# Altium PCB BMS_3.PcbDoc
Units mm, origin at the board's own origin, x right, y up, seen from the top; angles counter-clockwise.
Board outline 310 x 114 mm, 2 copper layers (Top Layer, Bottom Layer); 100 components, 103 nets, 399 pads, 0 vias.
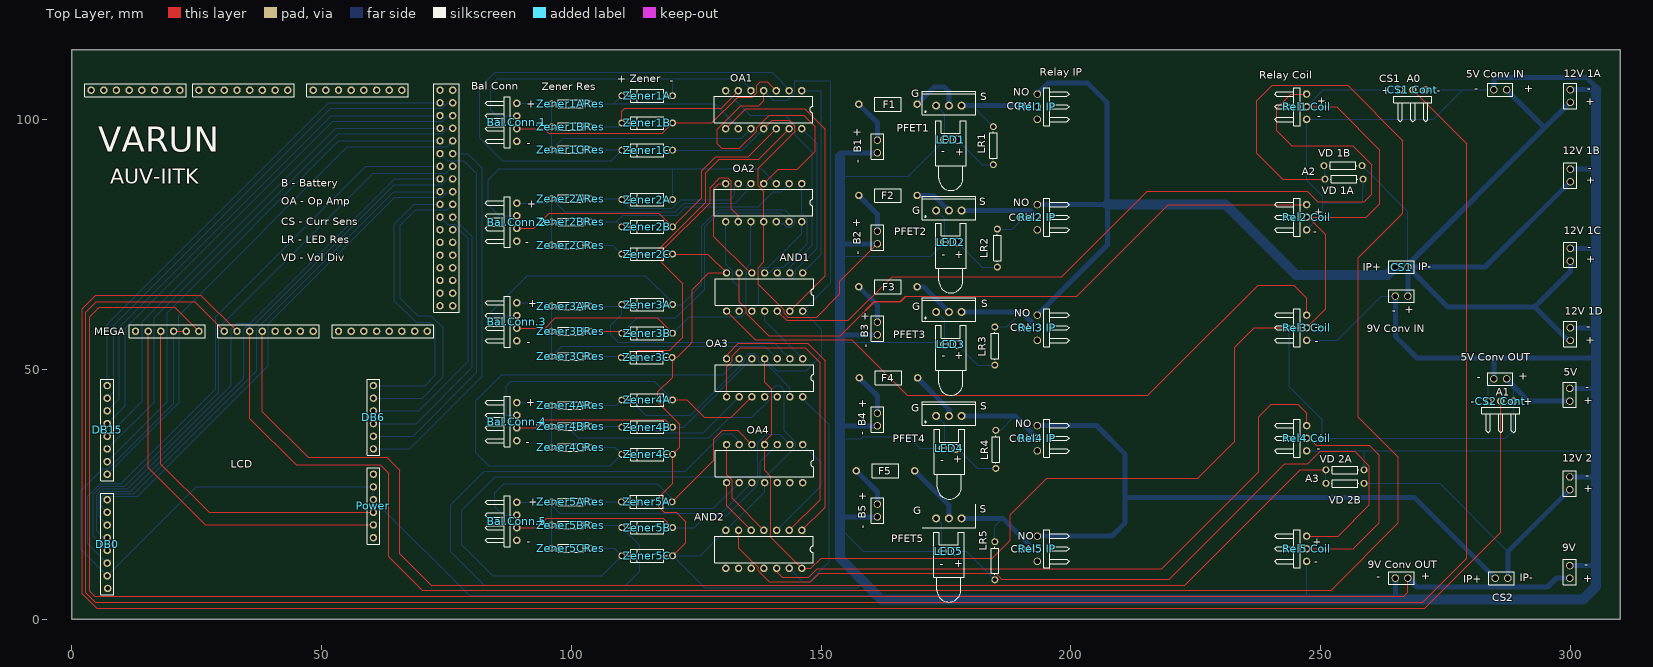
[diagram p0: Top Layer view]
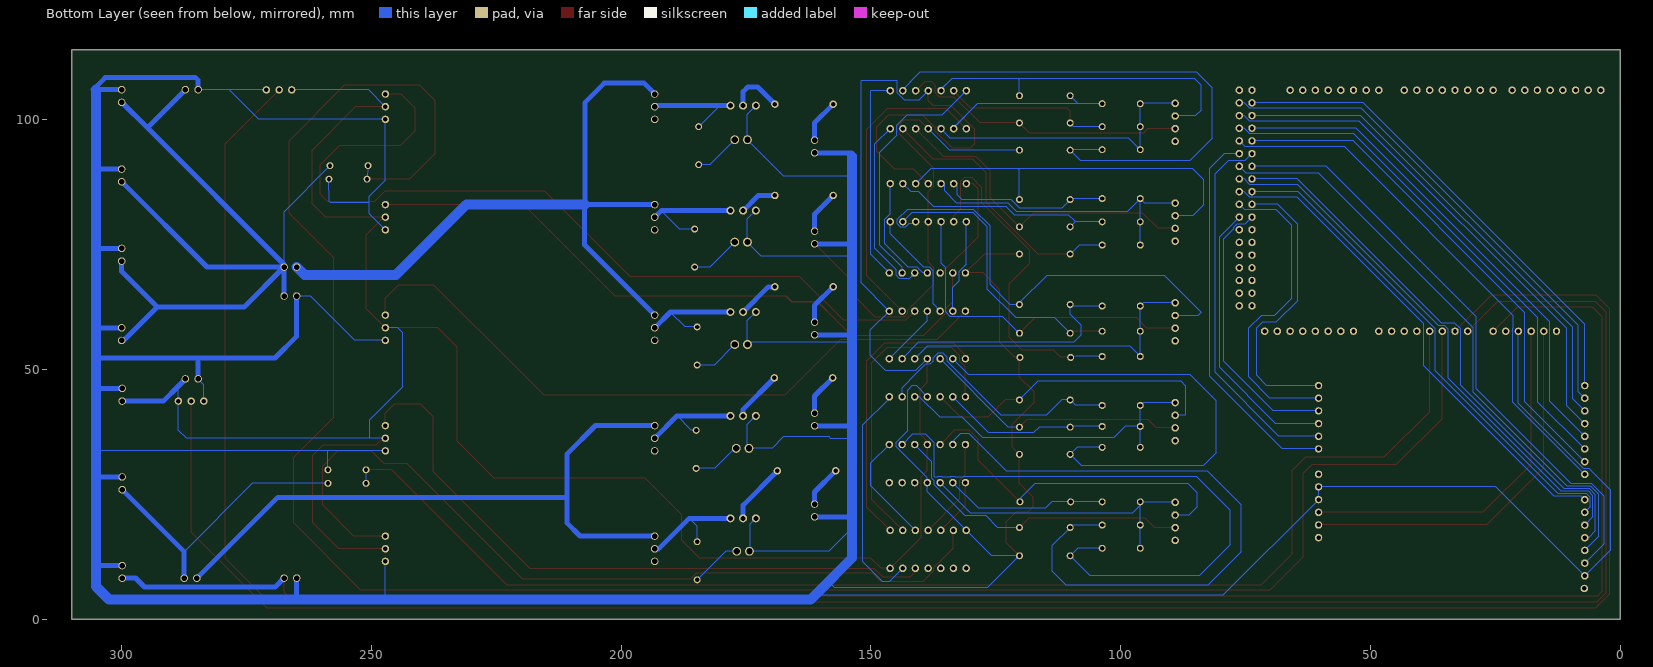
[diagram p1: Bottom Layer view, seen from below]

## Layer stack, top to bottom
Top Solder: solder mask 0.0102, Solder Resist, Dk 3.5
Top Layer: signal copper 0.0356
Dielectric 1: dielectric 0.32, FR-4, Dk 4.8
Bottom Layer: signal copper 0.0356
Bottom Solder: solder mask 0.0102, Solder Resist, Dk 3.5

## Board outline
0,0 310,0 310,114 0,114

## Design rules (kind name [scope] priority, off if disabled: settings)
Clearance [All] p1: gap=0.25
PolygonConnect [All] p1: connectstyle=Relief reliefconductorwidth=0.254 reliefentries=4 polygonreliefangle="90 Angle" airgapwidth=0.254
RoutingVias [All] p1: holewidth=0.6 width=1 viastyle="Through Hole" minholewidth=0.6 minwidth=1 maxholewidth=0.6 maxwidth=1
SolderMaskExpansion [All] p1: expansion=0.1
UnpouredPolygon [All] p1: allowunpoured=FALSE
Width [All] p1 off: maxlimit=0.1 minlimit=0.1 preferedwidth=0.1
29 further rules are at their usual default settings.

## Components (designator, comment, footprint, x,y, rotation, side; value= is the part's Value field where it differs from the comment)
5V "Header 2" HDR1X2 299.9,43.66 r90 top
"5V Conv IN" "Header 2" HDR1X2 287.24,106 r180 top (schematic designator "5V Conv. IN")
"5V Conv OUT" "Header 2" HDR1X2 287.24,48.1 r180 top (schematic designator "5V Conv. OUT")
9V "Header 2" HDR1X2 299.9,8.2 r90 top
"9V Conv IN" "Header 2" HDR1X2 267.5,64.7 r180 top (schematic designator "9V Conv. IN")
"9V Conv OUT" "Header 2" HDR1X2 267.5,8.24 r180 top (schematic designator "9V Conv. OUT")
"12V 1A" "Header 2" HDR1X2 300,103.46 r90 top
"12V 1B" "Header 2" HDR1X2 300,87.573 r90 top
"12V 1C" "Header 2" HDR1X2 300,71.687 r90 top
"12V 1D" "Header 2" HDR1X2 300,55.8 r90 top
"12V 2" "12V supply" HDR1X2 299.9,25.93 r90 top
AND1 "SN74ACT11D" N014 138.7,65.5 r180 top (schematic designator A1)
AND2 "SN74ACT11D" N014 138.56,13.99 r180 top (schematic designator A2)
B1 "Header 2" HDR1X2 161.3,95.9 r270 top
B2 "Battery" HDR1X2 161.3,77.685 r270 top
B3 "Battery" HDR1X2 161.3,59.47 r270 top
B4 "Battery" HDR1X2 161.3,41.255 r270 top
B5 "Battery" HDR1X2 161.3,23.04 r270 top
Bal.Conn.1 "Balance Connector" HDR1X4H 89.1,103.28 r270 top
Bal.Conn.2 "Balance Connector" HDR1X4H 89.1,83.31 r270 top
Bal.Conn.3 "Balance Connector" HDR1X4H 89.1,63.34 r270 top
Bal.Conn.4 "Balance Connector" HDR1X4H 89.1,43.37 r270 top
Bal.Conn.5 "Balance Connector" HDR1X4H 89.1,23.4 r270 top
CS1 "Header 2" HDR1X2 264.96,70.5 r0 top
"CS1 Cont" "Header 3H" HDR1X3H#1 265.96,105.96 r0 top (schematic designator "C.S.1 Cont.")
CS2 "Header 2" HDR1X2 284.96,8.2 r0 top
"CS2 Cont" "Header 3H" HDR1X3H#1 288.64,43.66 r180 top (schematic designator "C.S.2 Cont.")
DB0 "Header 8" HDR1X8#1 7.1,6.15 r90 top
DB6 "Header 6" HDR1X6 60.4,34.08 r90 top locked
DB15 "Header 8" HDR1X8#2 7.1,29 r90 top
F1 "Fuse" PIN-W2/E2.8 163.4,103.1 r180 top
F2 "Fuse" PIN-W2/E2.8 163.4,84.825 r180 top
F3 "Fuse" PIN-W2/E2.8 163.4,66.55 r180 top
F4 "Fuse" PIN-W2/E2.8 163.5,48.3 r180 top
F5 "Fuse5" PIN-W2/E2.8 162.9,29.7 r180 top
LED1 "LED" LED-0 176,96 r0 top
LED2 "LED" LED-0 176,75.5 r0 top
LED3 "LED" LED-0 176,55 r0 top
LED4 "LED" LED-0 175.7,34.2 r0 top
LED5 "LED" LED-0 175.6,13.6 r0 top
LR1 "500" AXIAL-0.3 184.5,94.8 r90 top
LR2 "500" AXIAL-0.3 185.3,74.3 r90 top
LR3 "500" AXIAL-0.3 184.8,54.7 r90 top
LR4 "500" AXIAL-0.3 185,34 r90 top
LR5 "500" AXIAL-0.3 184.8,11.7 r90 top
MEGA "Arduino" Arduino 33.08,83.05 r0 top
OA1 "LM324D" N014 138.52,102.01 r180 top
OA2 "LM324D" N014 138.52,83.4 r180 top
OA3 "LM324D" N014 138.7,48.33 r180 top
OA4 "LM324D" N014 138.7,31.16 r180 top
PFET1 "PMOS" TO-220AB 175.6,102.8 r0 top
PFET2 "PMOS" TO-220AB 175.6,81.8 r0 top
PFET3 "PMOS" TO-220AB 175.6,61.5 r0 top
PFET4 "PMOS" TO-220AB 175.6,40.7 r0 top
PFET5 "PMOS" TO-220AB 175.6,20.2 r0 top
Power "Header 6" HDR1X6 60.4,16.32 r90 top
"Rel1 Coil" "Relay coil" HDR1X3H#1 247.2,100.06 r90 top
"Rel1 IP" "Relay" HDR1X3H#2 193.3,100.06 r90 top
"Rel2 Coil" "Relay coil" HDR1X3H#1 247.2,77.935 r90 top
"Rel2 IP" "Relay" HDR1X3H#2 193.3,77.935 r90 top
"Rel3 Coil" "Relay coil" HDR1X3H#1 247.2,55.81 r90 top
"Rel3 IP" "Relay" HDR1X3H#2 193.3,55.81 r90 top
"Rel4 Coil" "Relay coil" HDR1X3H#1 247.2,33.685 r90 top
"Rel4 IP" "Relay" HDR1X3H#2 193.3,33.685 r90 top
"Rel5 Coil" "Relay coil" HDR1X3H#1 247.2,11.56 r90 top
"Rel5 IP" "Relay" HDR1X3H#2 193.3,11.56 r90 top
"VD 1A" "Res2" AXIAL-0.3 254.7,88.1 r180 top (schematic designator VD1A)
"VD 1B" "Res1" AXIAL-0.3 254.5,90.8 r0 top
"VD 2A" "Res1" AXIAL-0.3 254.9,27.2 r180 top
"VD 2B" "Res1" AXIAL-0.3 254.9,29.9 r0 top
Zener1A "D Zener" DIODE-0.4 115.2,104.8 r180 top
Zener1ARes "1K" AXIAL-0.3 99.9,103.2 r180 top
Zener1B "D Zener" DIODE-0.4 115.2,99.35 r180 top
Zener1BRes "1K" AXIAL-0.3 99.9,98.6 r180 top
Zener1C "D Zener" DIODE-0.4 115.2,93.9 r180 top
Zener1CRes "1K" AXIAL-0.3 99.9,94 r180 top
Zener2A "D Zener" DIODE-0.4 115.2,84 r180 top
Zener2ARes "1K" AXIAL-0.3 99.9,84.2 r180 top
Zener2B "D Zener" DIODE-0.4 115.2,78.55 r180 top
Zener2BRes "1K" AXIAL-0.3 99.9,79.55 r180 top
Zener2C "D Zener" DIODE-0.4 115.2,73.1 r180 top
Zener2CRes "1K" AXIAL-0.3 99.9,74.9 r180 top
Zener3A "D Zener" DIODE-0.4 115.2,63 r180 top
Zener3ARes "1K" AXIAL-0.3 99.9,62.7 r180 top
Zener3B "D Zener" DIODE-0.4 115.2,57.25 r180 top
Zener3BRes "1K" AXIAL-0.3 99.9,57.65 r180 top
Zener3C "D Zener" DIODE-0.4 115.1,52.4 r180 top
Zener3CRes "1K" AXIAL-0.3 99.9,52.6 r180 top
Zener4A "D Zener" DIODE-0.4 115.2,43.9 r180 top
Zener4ARes "1K" AXIAL-0.3 99.9,42.8 r180 top
Zener4B "D Zener" DIODE-0.4 115.2,38.45 r180 top
Zener4BRes "1K" AXIAL-0.3 99.9,38.6 r180 top
Zener4C "D Zener" DIODE-0.4 115.2,33 r180 top
Zener4CRes "1K" AXIAL-0.3 99.9,34.4 r180 top
Zener5A "D Zener" DIODE-0.4 115.1,23.5 r180 top
Zener5ARes "1K" AXIAL-0.3 99.9,23.5 r180 top
Zener5B "D Zener" DIODE-0.4 115.2,18.35 r180 top
Zener5BRes "1K" AXIAL-0.3 99.9,18.85 r180 top
Zener5C "D Zener" DIODE-0.4 115.2,12.7 r180 top
Zener5CRes "1K" AXIAL-0.3 99.9,14.2 r180 top

## Footprints (in the part's own frame and the unit in brackets; to place one, negate y for a bottom-side part, rotate by r counter-clockwise, add the part's x,y. Pads: shape width x height; smd on the part's side, far side on the other; paste and mask are expansions set on the pad)
Arduino [mm] "Arduino Mega 2560"
  round 1.5 hole 0.9: 0(10.16,22.86) 1(7.62,22.86) 2(5.08,22.86) 3(2.54,22.86) 4(0,22.86) 5(-2.54,22.86) 6(-5.08,22.86) 7(-7.62,22.86) 8(-11.43,22.86) 9(-13.97,22.86) 10(-16.51,22.86) 11(-19.05,22.86) 12(-21.59,22.86) 13(-24.13,22.86) 14(15.24,22.86) 15(17.78,22.86) 16(20.32,22.86) 17(22.86,22.86) 18(25.4,22.86) 19(27.94,22.86) 20(30.48,22.86) 21(33.02,22.86) 22(40.64,20.32) 23(43.18,20.32) 24(40.64,17.78) 25(43.18,17.78) 26(40.64,15.24) 27(43.18,15.24) 28(40.64,12.7) 29(43.18,12.7) 30(40.64,10.16) 31(43.18,10.16) 32(40.64,7.62) 33(43.18,7.62) 34(40.64,5.08) 35(43.18,5.08) 36(40.64,2.54) 37(43.18,2.54) 38(40.64,0) 39(43.18,0) 40(40.64,-2.54) 41(43.18,-2.54) 42(40.64,-5.08) 43(43.18,-5.08) 44(40.64,-7.62) 45(43.18,-7.62) 46(40.64,-10.16) 47(43.18,-10.16) 48(40.64,-12.7) 49(43.18,-12.7) 50(40.64,-15.24) 51(43.18,-15.24) 52(40.64,-17.78) 53(43.18,-17.78) 54(-20.32,-25.4) 55(-17.78,-25.4) 56(-15.24,-25.4) 57(-12.7,-25.4) 58(-10.16,-25.4) 59(-7.62,-25.4) 60(-2.54,-25.4) 61(0,-25.4) 62(2.54,-25.4) 63(5.08,-25.4) 64(7.62,-25.4) 65(10.16,-25.4) 66(12.7,-25.4) 67(15.24,-25.4) 68(20.32,-25.4) 69(22.86,-25.4) 70(25.4,-25.4) 71(27.94,-25.4) 72(30.48,-25.4) 73(33.02,-25.4) 74(35.56,-25.4) 75(38.1,-25.4) 76(-26.67,22.86) 77(-29.21,22.86) 78(40.64,-20.32) 79(43.18,-20.32) 80(43.18,22.86) 81(40.64,22.86)
  silkscreen extent -30.48,-26.67 44.45,24.13
AXIAL-0.3 [mm] "Axial Device, Thru-Hole; 2 Leads; 0.3 in Pin Spacing"
  round 1.4 hole 0.85: 1(-3.81,0) 2(3.81,0)
  silkscreen extent -2.77,-0.76 2.77,0.76
DIODE-0.4 [mm] "Diode, Thru-Hole; 2 Leads; 0.4 in Pin Spacing"
  round 1.4 hole 0.85: 1(-5.08,0) 2(5.08,0)
  silkscreen extent -4.06,-1.27 4.06,1.27
HDR1X2 [mm] "Connector; Header; 2 Position"
  round 1.5 hole 1.1: 1(0,0) 2(2.54,0)
  silkscreen extent -1.27,-1.27 3.81,1.27
HDR1X3H#1 [mm] "Connector; Header; 3 Position; Right Angle"
  round 1.5 hole 0.9: 1(0,0) 2(2.54,0) 3(5.08,0)
  silkscreen extent -1.27,-6.35 6.35,-1.27
HDR1X3H#2 [mm] "Connector; Header; 3 Position; Right Angle"
  round 1.5 hole 1.1: 1(0,0) 2(2.54,0) 3(5.08,0)
  silkscreen extent -1.27,-6.35 6.35,-1.27
HDR1X4H [mm] "Connector; Header; 4 Position; Right Angle"
  round 1.5 hole 0.9: 1(0,0) 2(2.54,0) 3(5.08,0) 4(7.62,0)
  silkscreen extent -1.27,-6.35 8.89,-1.27
HDR1X6 [mm] "Connector; Header; 6 Position"
  round 1.5 hole 0.9: 1(0,0) 2(2.54,0) 3(5.08,0) 4(7.62,0) 5(10.16,0) 6(12.7,0)
  silkscreen extent -1.27,-1.27 13.97,1.27
HDR1X8#1 [mm] "Connector; Header; 8 Position"
  round 1.5 hole 0.9: 1(0,-0.1) 2(2.54,0) 3(5.08,0) 4(7.62,0) 5(10.16,0) 6(12.7,0) 7(15.24,0) 8(17.78,0)
  silkscreen extent -1.27,-1.27 19.05,1.27
HDR1X8#2 [mm] "Connector; Header; 8 Position"
  round 1.5 hole 0.9: 1(0,0) 2(2.54,0) 3(5.08,0) 4(7.62,0) 5(10.16,0) 6(12.7,0) 7(15.24,0) 8(17.78,0)
  silkscreen extent -1.27,-1.27 19.05,1.27
LED-0 [mil] "LED; 2 Leads"
  round 70 hole 50: 1(50,0) 2(-50,0)
  silkscreen extent -120,-400 120,150
N014 [mm] "DIP; 14 Leads; Row Spacing 7.62 mm; Pitch 2.54 mm"
  round 1.5 hole 0.9: 1(-7.62,-3.81) 2(-5.08,-3.81) 3(-2.54,-3.81) 4(0,-3.81) 5(2.54,-3.81) 6(5.08,-3.81) 7(7.62,-3.81) 8(7.62,3.81) 9(5.08,3.81) 10(2.54,3.81) 11(0,3.81) 12(-2.54,3.81) 13(-5.08,3.81) 14(-7.62,3.81)
  silkscreen extent -9.85,-2.65 9.85,2.65
PIN-W2/E2.8 [mm] "Thru-Hole; 2 Leads"
  round 1.5 hole 0.9: 1(-5.825,0) 2(5.825,0)
  silkscreen extent -2.65,-1.4 2.65,1.4
TO-220AB [mm] "TO, Thru-Hole, Vertical, Heatsink Mounted; 3 In-Line Leads; Pitch 2.54 mm"
  round 1.6 hole 1: 1(-2.54,0) 2(0,0) 3(2.54,0)
  silkscreen extent -5.35,-1.85 5.35,2.85, body extent -5.4,-1.9 5.4,2.9, height 19.3

## Part data
5V "5V Conv IN" "5V Conv OUT" 9V "9V Conv IN" "9V Conv OUT" "12V 1A" "12V 1B" "12V 1C" "12V 1D" B1 CS1 CS2: "Header, 2-Pin"
"12V 2" B2 B3 B4 B5: library part "Header 2", "Header, 2-Pin"
AND1 AND2: "Triple 3-Input Positive-AND Gate"
Bal.Conn.1 Bal.Conn.2 Bal.Conn.3 Bal.Conn.4 Bal.Conn.5: library part "Header 4H", "Header, 4-Pin, Right Angle"
"CS1 Cont" "CS2 Cont": "Header, 3-Pin, Right Angle"
DB0 DB15: "Header, 8-Pin"
DB6 Power: "Header, 6-Pin"
F1 F2 F3 F4: library part "Fuse 1"
F5: library part "Fuse 1", "Fuse"
LED1 LED2 LED3 LED4 LED5: library part LED0, "Typical INFRARED GaAs LED"
LR1 LR2 LR3 LR4 LR5 "VD 1A" Zener1ARes Zener1BRes Zener1CRes Zener2ARes Zener2BRes Zener2CRes Zener3ARes Zener3BRes Zener3CRes Zener4ARes Zener4BRes Zener4CRes Zener5ARes Zener5BRes Zener5CRes: library part Res1, "Resistor"
OA1 OA2 OA3 OA4: "Quadruple Operational Amplifier"
PFET1 PFET2 PFET3 PFET4 PFET5: library part PMOS-2, "P-Channel Power MOSFET"
"Rel1 Coil" "Rel1 IP" "Rel2 Coil" "Rel2 IP" "Rel3 Coil" "Rel3 IP" "Rel4 Coil" "Rel4 IP" "Rel5 Coil" "Rel5 IP": library part "Header 3H", "Header, 3-Pin, Right Angle"
"VD 1B" "VD 2A" "VD 2B": "Resistor"
Zener1A Zener1B Zener1C Zener2A Zener2B Zener2C Zener3A Zener3B Zener3C Zener4A Zener4B Zener4C Zener5A Zener5B Zener5C: "Zener Diode"

## Nets (pads, with @x,y where several pads share a name; then routed paths per layer and width w, separated by ;. In a path a pad name is that pad's centre, name@x,y a point inside that pad or via, vN(x,y) a via of type N, cw(c..) or ccw(c..) an arc to the next point about the centre after c; other vN are vias at no path point)
GND: 5V.2 9V.2 "5V Conv IN.2" "5V Conv OUT.2" "9V Conv IN.2" "9V Conv OUT.2" "12V 1A.2" "12V 1B.2" "12V 1C.2" "12V 1D.2" "12V 2.2" "CS1 Cont.3" "CS2 Cont.3" "Rel1 Coil.1" "Rel2 Coil.1" "Rel3 Coil.1" "Rel4 Coil.1" "Rel5 Coil.1" "VD 1A.1" "VD 2B.2" AND1.7 AND2.7 B1.2 B2.2 B3.2 B4.2 B5.2 DB0.2 LED1.2 LED2.2 LED3.2 LED4.2 LED5.2 MEGA.57 MEGA.58 OA1.11 OA2.11 OA3.11 OA4.11 PFET1.1 PFET2.1 PFET3.1 PFET4.1 PFET5.1 Power.4 Power.5 Zener1C.1 Zener2C.1 Zener3C.1 Zener4C.1 Zener5C.1 | length 1333.8
  Top Layer w0.25: MEGA.57 MEGA.58 MEGA.58@22.92,58.28 ; Zener5C.1 122.9,15.32 122.9,19.5 121,21.4 118.6,21.4 117.5,22.5 117.5,24.4 120.28,27.18 Zener4C.1 121.7,34.42 121.7,39 117.3,43.4 117.3,45.5 120.28,48.48 120.28,52.3 Zener3C.1 121.18,52.4 124.2,55.42 124.2,66 127.51,69.31 AND1.7 127.29,73.1 Zener2C.1 ; OA1.11 140.22,99.9 143.494,99.9 144.727,98.667 144.727,97.787 144.8,97.714 137.393,90.307 137.393,86.743 138.52,85.616 OA2.11 138.52,71.52 137.4,70.4 137.4,67.1 141.683,62.817 141.707,62.817 142.653,61.871 142.653,61.223 143.376,60.5 149.1,60.5 153.775,65.175 153.775,67.62 B2.2
  Bottom Layer w0.25: MEGA.57 20.38,43.226 7.281,30.127 6.194,30.127 1.9,25.833 1.9,13.89 DB0.2 24.89,26.48 Power.5 Power.4 79.54,4.8 159.9,4.8 160.55,5.45 ; Zener1C.1 134.25,93.9 OA1.11@138.64,98.29 ; OA3.11 140.88,46.7 141.8,46.7 142.653,45.847 142.653,37.698 144.907,35.444 144.907,34.503 138.7,28.296 OA4.11 138.7,25.56 AND2.7 125.84,12.7 Zener5C.1 126.68,6.3 157.3,6.3 158.5,7.5 ; 153.775,18.3 158.475,13.6 174.13,13.6 174.13,19.13 PFET5.1 ; 153.775,36.1 158.013,36.1 158.39,36.477 167.517,36.477 169.794,34.2 174.73,34.2 174.73,39.03 PFET4.1 ; 153.775,38.9 153.96,38.715 ; 153.775,55.4 174.33,55.4 LED3.2 174.73,59.83 PFET3.1 PFET3.1@173.06,61.06 ; 153.775,56.7 154.005,56.93 ; 153.775,72.7 171.93,72.7 LED2.2 174.73,80.13 PFET2.1 ; 153.775,88.7 167.43,88.7 LED1.2 174.73,101.13 PFET1.1 ; 247.1,3.9 247.2,4 247.2,11.56 ; 247.2,33.685 258.6,33.685 ; 247.2,55.81 253.31,55.81 262.2,64.7 264.96,64.7 ; 247.2,77.935 250.4,81.135 250.4,83.4 ; 258.51,88.1 258.41,83.61 258.2,83.4 250.4,83.4 ; 258.71,29.9 258.71,33.575 258.6,33.685 ; 264.9,3.9 264.96,3.96 ; 271.04,105.96 278.5,105.96 ; 283.56,43.66 283.56,46.96 284.7,48.1 ; 284.7,51.5 285.5,52.3 ; 284.7,106 284.66,105.96 278.5,105.96 ; 284.7,107.9 285.2,108.4 ; 304.86,58.34 305.1,58.1 ; 304.9,46.2 305.1,46.4 ; 304.94,10.74 305.1,10.9 ; 304.987,90.113 305.1,90 ; 305.07,28.47 305.1,28.5 ; 305.1,33.7 305.085,33.685 258.6,33.685 ; 250.4,83.4 250.4,84.7 247.2,87.9 247.2,100.06 272.6,100.06 278.5,105.96
  Bottom Layer w1: 153.3,92.8 153.86,93.36 B1.2 ; 153.775,20.5 B5.2 ; 153.96,38.715 B4.2 ; 154.005,56.93 B3.2 ; 154.02,75.145 B2.2 ; 264.96,3.96 264.96,8.24 ; 264.96,64.7 264.96,56.64 269.3,52.3 285.5,52.3 305.1,52.3 ; 284.7,48.1 284.7,51.5 ; 284.7,106 284.7,107.9 ; 285.2,108.4 303.3,108.4 305.7,106 300,106 ; 9V.2 304.94,10.74 ; 299.9,28.47 305.07,28.47 ; 5V.2 304.9,46.2 ; 300,58.34 304.86,58.34 ; 300,74.227 304.873,74.227 ; 300,90.113 304.987,90.113
  Bottom Layer w2: 153.775,92.5 153.775,88.7 153.775,72.7 153.775,56.7 153.775,55.4 153.775,38.9 153.775,36.1 153.775,20.5 153.775,18.3 153.775,12.225 160.55,5.45 162.1,3.9 247.1,3.9 264.9,3.9 302.5,3.9 305.1,6.5 305.1,10.9 305.1,28.5 305.1,33.7 305.1,46.4 305.1,52.3 305.1,58.1 305.1,90 305.1,106
"Net5V Conv IN_1": "5V Conv IN.1" "9V Conv IN.1" "12V 1A.1" "12V 1B.1" "12V 1C.1" "12V 1D.1" "VD 1B.2" CS1.2 | length 176.9
  Bottom Layer w0.25: 258.31,90.8 267.5,81.61 267.5,71.025 CS1.2
  Bottom Layer w1: 267.5,64.7 CS1.2 ; CS1.2@267.5,71.025 294.9,98.425 ; 287.24,106 294.815,98.425 294.9,98.425 ; 300,55.8 299.6,55.8 292.9,62.5 ; 300,71.687 300,69.6 292.9,62.5 ; 300,87.573 282.927,70.5 CS1.2 ; 300,103.46 299.935,103.46 294.9,98.425 ; CS1.2 275.5,62.5 292.9,62.5
Net9V_1: 9V.1 "9V Conv OUT.1" MEGA.59 | length 381
  Top Layer w0.25: MEGA.59 20.61,62.5 5.5,62.5 3.6,60.6 3.6,5.6 4.6,4.6 266.7,4.6 267.5,5.4 267.5,8.24
  Bottom Layer w1: 267.5,8.24 269.29,6.45 295.45,6.45 297.24,8.24 299.86,8.24 9V.1
"Net12V 2_1": "12V 2.1" "VD 2A.1" CS2.2 | length 57.3
  Bottom Layer w0.25: 258.71,27.2 273.83,27.2 287.5,13.53
  Bottom Layer w1: CS2.2 287.5,13.53 299.9,25.93
NetA1_1: AND1.1 OA1.1 | length 42
  Bottom Layer w0.25: OA1.1 150.08,105.82 150.08,73.07 AND1.1
NetA1_2: AND1.2 OA1.7 | length 49.6
  Bottom Layer w0.25: OA1.7 135.82,100.9 142.8,100.9 144.8,98.9 144.8,96.9 148.2,93.5 148.2,74.9 143.78,70.48 AND1.2
NetA1_3: AND1.3 OA1.14 | length 36.9
  Bottom Layer w0.25: AND1.3 142.45,68.1 142.533,68.183 144.247,68.183 144.907,68.843 144.907,69.93 146.677,71.7 149.2,74.223 149.2,95.14 OA1.14
NetA1_4: AND1.4 OA2.1 | length 23.5
  Bottom Layer w0.25: AND1.4 139.646,69.31 140.773,70.437 142.537,70.437 147.267,75.167 147.267,80.057 146.14,81.184 OA2.1
NetA1_5: AND1.5 OA2.7 | length 23.1
  Top Layer w0.25: OA2.7 129.51,87.21 128.5,86.2 128.5,76.6 135.79,69.31 AND1.5
NetA1_6: "Rel2 Coil.3" AND1.6 | length 133.6
  Top Layer w0.25: AND1.6 133.62,63.58 135.033,62.167 135.033,61.223 139.556,56.7 153.8,56.7 159,61.9 ; 167,64.7 201.17,64.7 219.485,83.015 247.2,83.015
  Top Layer w0.254: 159,61.9 160.7,63.6 165.9,63.6 167,64.7
NetA1_8: "Rel3 Coil.3" AND1.8 | length 136.8
  Top Layer w0.25: AND1.8 136.87,55.9 156.2,55.9 164.8,47.3 167.3,44.8 215.4,44.8 220,49.4 237.5,66.9 244.59,66.9 247.2,64.29 247.2,60.89
NetA1_9: AND1.9 OA2.8 | length 19
  Bottom Layer w0.25: OA2.8 130.9,71.084 132.3,69.684 132.3,67.8 133.62,66.48 AND1.9
NetA1_10: AND1.10 OA2.14 | length 22.7
  Bottom Layer w0.25: AND1.10 137.573,63.103 137.573,69.777 138.233,70.437 139.437,70.437 146.14,77.14 OA2.14
NetA1_11: AND1.11 OA3.1 | length 12.7
  Bottom Layer w0.25: AND1.11 138.7,59.76 OA3.1
NetA1_12: "Rel1 Coil.3" AND1.12 | length 171.6
  Top Layer w0.25: AND1.12 143.13,59.8 155.5,59.8 164.3,68.6 198.2,68.6 215.3,85.7 247.3,85.7 249.4,83.6 258.8,83.6 260.3,85.1 260.3,91 256.5,94.8 244.2,94.8 241.2,97.8 241.2,102.3 244.04,105.14 247.2,105.14
NetA1_13: AND1.13 OA1.8 | length 62.6
  Top Layer w0.25: OA1.8 134.9,102.2 146.7,102.2 150.8,98.1 150.8,68.71 AND1.13
NetA2_1: AND2.1 OA3.7 | length 58.7
  Top Layer w0.25: OA3.7 131.08,52.88 133.4,55.2 147.3,55.2 150.8,51.7 150.8,43.2 150.8,22.42 AND2.1
NetA2_2: AND2.2 OA3.8 | length 64.7
  Top Layer w0.25: OA3.8 131.08,50.546 132.207,51.673 132.207,52.707 133.8,54.3 146.8,54.3 149.8,51.3 149.8,23.96 AND2.2 AND2.2@144.147,17.8
NetA2_3: AND2.3 OA4.1 | length 22.4
  Bottom Layer w0.25: AND2.3 150,26.7 150,31.29 OA4.1
NetA2_4: AND2.4 OA4.7 | length 20.3
  Top Layer w0.25: OA4.7 131.08,28.944 132.207,27.817 132.207,24.193 138.56,17.84 AND2.4
NetA2_5: AND2.5 OA4.8 | length 11.6
  Top Layer w0.25: OA4.8 131.08,22.74 AND2.5
NetA2_6: "Rel5 Coil.3" AND2.6 | length 169
  Top Layer w0.25: AND2.6 133.48,14.22 136.393,11.307 136.487,11.307 137.433,10.361 137.433,9.713 139.646,7.5 147.9,7.5 149.596,9.196 185.017,9.196 186.213,8 219.7,8 242.8,31.1 247.4,31.1 249.9,33.6 256.82,33.6 259.787,30.633 259.787,22.887 253.54,16.64 247.2,16.64
NetA2_12: "Rel4 Coil.3" AND2.12 | length 131.2
  Top Layer w0.25: AND2.12 141.1,9.5 142.2,8.4 147.5,8.4 149.2,10.1 218.2,10.1 237.6,29.5 237.6,40.5 240.1,43 245.4,43 247.2,41.2 247.2,38.765
NetA2_13: AND2.13 OA3.14 | length 45.9
  Bottom Layer w0.25: AND2.13 146.32,7.5 147.6,7.5 151.6,11.5 151.6,38.9 146.32,44.18 OA3.14
NetB1_1: B1.1 F1.2 | length 8.7
  Bottom Layer w1: F1.2 161.3,99.375 B1.1
NetB2_1: B2.1 F2.2 | length 8.7
  Bottom Layer w1: F2.2 161.3,81.1 B2.1
NetB3_1: B3.1 F3.2 | length 8.6
  Bottom Layer w1: F3.2 161.3,62.825 B3.1
NetB4_1: B4.1 F4.2 | length 8.5
  Bottom Layer w1: F4.2 161.3,44.675 B4.1
NetB5_1: B5.1 F5.2 | length 8.4
  Bottom Layer w1: F5.2 161.3,25.475 B5.1
NetBal.Conn.1_1: Bal.Conn.1.1 OA1.10 Zener1ARes.2 Zener1BRes.2 Zener1CRes.2 | length 66.5
  Top Layer w0.25: Zener1ARes.2@96.01,103.28 Zener1ARes.2
  Bottom Layer w0.25: Bal.Conn.1.1 Zener1ARes.2@96.01,103.28 ; Zener1ARes.2 Zener1BRes.2 Zener1CRes.2 98.39,96.3 134.17,96.3 ; 134.17,96.3 OA1.10@136.025,98.155 ; 134.17,96.3 OA1.10@136.16,98.29 ; 134.17,96.3 OA1.10@136.16,98.29 ; 134.17,96.3 OA1.10@136.025,98.155 ; OA1.10@136.025,98.155 OA1.10@136.16,98.29 ; OA1.10@136.025,98.155 OA1.10@136.16,98.29
NetBal.Conn.1_2: Bal.Conn.1.2 OA1.5 Zener1A.1 | length 77.6
  Bottom Layer w0.25: Bal.Conn.1.2 85.06,100.74 83.9,101.9 83.9,106.9 85.2,108.2 120.5,108.2 ; Zener1A.1 120.28,107.98 120.5,108.2 ; 120.5,108.2 133.87,108.2 ; 133.87,108.2 OA1.5@136.16,105.91 ; 133.87,108.2 OA1.5@136.16,105.91 ; 133.87,108.2 OA1.5@136.115,105.955 ; 133.87,108.2 OA1.5@136.115,105.955 ; OA1.5@136.115,105.955 OA1.5@136.16,105.91 ; OA1.5@136.115,105.955 OA1.5@136.16,105.91
NetBal.Conn.1_3: Bal.Conn.1.3 OA1.3 Zener1B.1 | length 58.3
  Top Layer w0.25: Bal.Conn.1.3 94.613,98.2 95.54,97.273 118.203,97.273 Zener1B.1 128.126,99.35 133.288,104.512 136.266,104.512 137.107,105.353 137.107,106.907 137.8,107.6 139.28,107.6 OA1.3
NetBal.Conn.2_1: Bal.Conn.2.1 OA2.5 Zener2ARes.2 Zener2BRes.2 Zener2CRes.2 | length 60.1
  Bottom Layer w0.25: Bal.Conn.2.1 95.2,83.31 Zener2ARes.2 ; Zener2CRes.2 Zener2BRes.2 Zener2ARes.2 ; OA2.5@135.26,87.21 135.26,85.76 132.8,83.3 122.523,83.3 120.823,81.6 98.69,81.6 Zener2ARes.2
NetBal.Conn.2_2: Bal.Conn.2.2 OA2.3 Zener2A.1 | length 77.7
  Bottom Layer w0.25: Bal.Conn.2.2 85.63,80.77 83.4,83 83.4,88 85.6,90.2 120.5,90.2 ; Zener2A.1 120.28,89.98 120.5,90.2 ; OA2.3 138.07,90.2 137.35,90.2 120.5,90.2
NetBal.Conn.2_3: Bal.Conn.2.3 OA1.12 Zener2B.1 | length 65.7
  Top Layer w0.25: Bal.Conn.2.3 92.53,78.23 95.6,81.3 117.53,81.3 Zener2B.1 126.1,84.37 126.1,89.8 128.9,92.6 135.46,92.6 OA1.12
NetBal.Conn.3_1: Bal.Conn.3.1 OA3.3 Zener3ARes.2 Zener3BRes.2 Zener3CRes.2 | length 64.4
  Bottom Layer w0.25: Bal.Conn.3.1 95.45,63.34 Zener3ARes.2 Zener3BRes.2 Zener3CRes.2 98.09,54.6 138.78,54.6 OA3.3
NetBal.Conn.3_2: Bal.Conn.3.2 OA2.12 Zener3A.1 | length 93.4
  Top Layer w0.25: Bal.Conn.3.2 Bal.Conn.3.2@89.3,60.8
  Bottom Layer w0.25: Bal.Conn.3.2 84.6,60.8 83.9,61.5 91.2,68.8 114.8,68.8 120.28,63.32 Zener3A.1 122.1,63 126.143,67.043 126.143,78.039 126.143,78.756 129.387,82 130.104,82 142.784,82 144.727,80.057 144.727,79.123 144.067,78.463 143.133,78.463 142.473,79.123 141.527,79.123 OA2.12@140.803,79.847
NetBal.Conn.3_3: Bal.Conn.3.3 OA2.10 Zener3B.1 | length 68.9
  Top Layer w0.25: Bal.Conn.3.3 94.76,58.26 96.8,60.3 117.23,60.3 Zener3B.1
  Bottom Layer w0.25: Zener3B.1 123.593,60.563 134.087,60.563 135.033,61.509 ; 135.033,62.157 135.033,61.509 ; OA2.10 135.98,71.28 135.033,70.333 135.033,61.509
NetBal.Conn.4_1: Bal.Conn.4.1 OA3.12 Zener4ARes.2 Zener4BRes.2 Zener4CRes.2 | length 65.1
  Bottom Layer w0.25: Bal.Conn.4.1 95.52,43.37 Zener4ARes.2 Zener4BRes.2 ; Zener4CRes.2 Zener4BRes.2 ; OA3.12 140.294,44.52 136.174,40.4 131.7,40.4 127.6,36.3 101.4,36.3 99.1,38.6 Zener4BRes.2
NetBal.Conn.4_2: Bal.Conn.4.2 OA3.10 Zener4A.1 | length 62.2
  Top Layer w0.25: Zener4A.1 123.1,43.9 126.6,40.4 132.04,40.4 OA3.10
  Bottom Layer w0.25: Bal.Conn.4.2 86.97,40.83 86.97,46.67 87.9,47.6 116.58,47.6 Zener4A.1
NetBal.Conn.4_3: Bal.Conn.4.3 OA3.5 Zener4B.1 | length 54
  Top Layer w0.25: Bal.Conn.4.3 92.89,38.29 94.5,39.9 118.83,39.9 Zener4B.1
  Bottom Layer w0.25: Zener4B.1 122.47,38.45 OA3.5
NetBal.Conn.5_1: Bal.Conn.5.1 OA4.10 Zener5ARes.2 Zener5BRes.2 Zener5CRes.2 | length 59.6
  Top Layer w0.25: Zener5ARes.2@95.99,23.4 Zener5ARes.2 Zener5ARes.2@96.09,22.81
  Bottom Layer w0.25: Bal.Conn.5.1 Zener5ARes.2@95.99,23.4 ; Zener5CRes.2 Zener5BRes.2 96.09,22.81 97.7,21.2 130.01,21.2 OA4.10
NetBal.Conn.5_2: Bal.Conn.5.2 OA4.5 Zener5A.1 | length 71
  Top Layer w0.25: Zener5A.1 128.5,31.82 128.5,36 130.3,37.8 133.33,37.8 OA4.5
  Bottom Layer w0.25: Bal.Conn.5.2 86.34,20.86 84.7,22.5 84.7,25.3 86.5,27.1 117.18,27.1 Zener5A.1@120.28,24
NetBal.Conn.5_3: Bal.Conn.5.3 OA4.3 Zener5B.1 | length 63
  Top Layer w0.25: Bal.Conn.5.3 93.22,18.32 95.1,20.2 118.43,20.2 Zener5B.1
  Bottom Layer w0.25: Zener5B.1 124.62,18.35 126.966,20.696 131.1,20.696 137.287,26.883 137.287,27.764 137.791,28.268 137.791,31.521 OA4.3
"NetCS1 Cont_2": "CS1 Cont.2" MEGA.60 | length 466.4
  Top Layer w0.25: MEGA.60 24.59,63.6 4.9,63.6 2.8,61.5 2.8,5.3 4.7,3.4 270.5,3.4 279.3,12.2 279.3,95.16 268.5,105.96
NetCS1_1: "Rel1 IP.3" "Rel2 IP.3" "Rel3 IP.3" CS1.1 | length 143
  Bottom Layer w1: 193.3,60.89 207.31,74.9 207.31,83.005 207.3,83.015 ; 193.3,83.015 207.3,83.015 ; 193.3,105.14 193.3,105.2 195.4,107.3 203.4,107.3 207.3,103.4 207.3,83.015
  Bottom Layer w2: 207.3,83.015 231.015,83.015 245.13,68.9 263.36,68.9 CS1.1
"NetCS2 Cont_2": "CS2 Cont.2" MEGA.61 | length 410
  Top Layer w0.25: MEGA.61 25.83,64.9 4.8,64.9 2.1,62.2 2.1,5.1 5,2.2 270.9,2.2 286.1,17.4 286.1,43.66
NetCS2_1: "Rel4 IP.3" "Rel5 IP.3" CS2.1 | length 133.2
  Bottom Layer w1: 193.3,16.64 208.24,16.64 210.9,19.3 210.9,24.4 ; 193.3,38.765 205.135,38.765 210.9,33 210.9,24.4 ; CS2.1 268.76,24.4 210.9,24.4
NetDB0_3: DB0.3 MEGA.32 | length 121.4
  Bottom Layer w0.25: DB0.3 3.2,15.13 3.2,24.613 5.707,27.12 9.82,27.12 28.8,46.1 28.8,60.6 58.87,90.67 MEGA.32
NetDB0_4: DB0.4 MEGA.33 | length 119.1
  Bottom Layer w0.25: DB0.4 4.3,16.57 4.3,25 5.916,26.616 10.616,26.616 29.413,45.413 29.413,58.304 60.366,89.257 74.847,89.257 MEGA.33
NetDB0_5: DB0.5 MEGA.34 | length 111.5
  Bottom Layer w0.25: DB0.5 6.32,16.31 4.965,17.665 4.965,24.952 6.125,26.112 11.212,26.112 31.953,46.853 31.953,58.117 33.117,59.281 35.781,59.281 64.63,88.13 MEGA.34
NetDB0_6: DB0.6 MEGA.35 | length 109.4
  Bottom Layer w0.25: DB0.6 5.469,20.481 5.469,24.743 6.334,25.608 11.808,25.608 34.4,48.2 34.4,58.024 35.153,58.777 36.377,58.777 64.603,87.003 74.187,87.003 75.314,88.13 MEGA.35
NetDB0_7: DB0.7 MEGA.36 | length 101.5
  Bottom Layer w0.25: DB0.7 5.973,22.517 5.973,24.397 6.68,25.104 12.404,25.104 37.033,49.733 37.033,58.117 64.506,85.59 MEGA.36
NetDB0_8: DB0.8 MEGA.37 | length 99.6
  Bottom Layer w0.25: DB0.8 7.77,24.6 13.2,24.6 39.3,50.7 39.3,59.1 64.663,84.463 74.187,84.463 75.314,85.59 MEGA.37
NetDB6_1: DB6.1 MEGA.31 | length 76.7
  Bottom Layer w0.25: DB6.1 67.68,34.08 82.2,48.6 82.2,90.3 79.29,93.21 MEGA.31
NetDB6_2: DB6.2 MEGA.30 | length 74.8
  Bottom Layer w0.25: DB6.2 68.32,36.62 81.1,49.4 81.1,89.2 78.503,91.797 75.133,91.797 MEGA.30
NetDB6_3: DB6.3 MEGA.41 | length 56.2
  Bottom Layer w0.25: DB6.3 68.96,39.16 80.2,50.4 80.2,76.57 MEGA.41
NetDB6_4: DB6.4 MEGA.40 | length 55.3
  Bottom Layer w0.25: DB6.4 69.5,41.7 79.4,51.6 79.4,76.2 77.387,78.213 77.387,78.437 76.727,79.097 75.133,79.097 MEGA.40
NetDB6_5: DB6.5 MEGA.39 | length 63.5
  Bottom Layer w0.25: DB6.5 70.14,44.24 74.4,48.5 74.4,58.3 71.9,60.8 69.3,60.8 65.8,64.3 65.8,78.9 68.9,82 73.176,82 73.253,81.923 75.133,81.923 MEGA.39
NetDB6_6: DB6.6 MEGA.38 | length 59.3
  Bottom Layer w0.25: DB6.6 70.78,46.78 72.8,48.8 72.8,58.3 71.7,59.4 69,59.4 64.6,63.8 64.6,79.1 68.55,83.05 MEGA.38
NetDB15_1: DB15.1 MEGA.29 | length 107.1
  Bottom Layer w0.25: DB15.1 21.507,43.407 21.507,58.224 21.4,58.331 21.4,60.8 55.2,94.6 75.11,94.6 MEGA.29
NetDB15_2: DB15.2 MEGA.28 | length 103.7
  Bottom Layer w0.25: DB15.2 19.1,43.54 19.1,61.4 53.45,95.75 MEGA.28
NetDB15_3: DB15.3 MEGA.27 | length 105.6
  Bottom Layer w0.25: DB15.3 16.5,43.48 16.5,60.3 53.363,97.163 74.187,97.163 75.314,98.29 MEGA.27
NetDB15_4: DB15.4 MEGA.26 | length 101.5
  Bottom Layer w0.25: DB15.4 14.1,43.62 14.1,59.5 52.89,98.29 MEGA.26
NetDB15_5: DB15.5 MEGA.25 | length 103.7
  Bottom Layer w0.25: DB15.5 10.7,42.76 10.7,58.2 52.203,99.703 74.187,99.703 75.314,100.83 MEGA.25
NetDB15_6: DB15.6 MEGA.24 | length 99.5
  Bottom Layer w0.25: DB15.6 9.5,44.1 9.5,58.4 51.93,100.83 MEGA.24
NetDB15_7: DB15.7 MEGA.23 | length 101.4
  Bottom Layer w0.25: DB15.7 8.4,45.54 8.4,58.8 51.843,102.243 74.187,102.243 75.314,103.37 MEGA.23
NetDB15_8: DB15.8 MEGA.22 | length 97.2
  Bottom Layer w0.25: DB15.8 7.1,59 51.47,103.37 MEGA.22
NetF1_1: F1.1 PFET1.2 | length 11.2
  Bottom Layer w0.25: PFET1.2@175.437,102.8 PFET1.2
  Bottom Layer w1: F1.1 172.7,106.575 174.625,106.575 175.6,105.6 PFET1.2
NetF2_1: F2.1 PFET2.2 | length 7.6
  Bottom Layer w1: F2.1 172.575,84.825 PFET2.2
NetF3_1: F3.1 PFET3.2 | length 8.5
  Bottom Layer w1: F3.1 170.55,66.55 PFET3.2
NetF4_1: F4.1 PFET4.2 | length 10.2
  Bottom Layer w1: F4.1 175.6,42.025 PFET4.2
NetF5_1: F5.1 PFET5.2 | length 12.3
  Bottom Layer w1: F5.1 175.6,22.825 PFET5.2
NetLED1_1: LED1.1 LR1.1 | length 9.3
  Bottom Layer w0.25: LED1.1 182.28,90.99 LR1.1
NetLED2_1: LED2.1 LR2.1 | length 10.1
  Bottom Layer w0.25: LED2.1 182.28,70.49 LR2.1
NetLED3_1: LED3.1 LR3.1 | length 9.2
  Bottom Layer w0.25: LED3.1 181.38,50.89 LR3.1
NetLED4_1: LED4.1 LR4.1 | length 9.4
  Bottom Layer w0.25: LED4.1@177.27,34.2 181.28,30.19 LR4.1
NetLED5_1: LED5.1 LR5.1 | length 10.5
  Bottom Layer w0.25: LED5.1@176.67,13.6 179.09,13.6 LR5.1
NetLR1_2: "Rel1 IP.2" LR1.2 PFET1.3 | length 23.3
  Bottom Layer w0.25: PFET1.3 180.31,102.8 LR1.2
  Bottom Layer w1: PFET1.3 193.1,102.8 193.3,102.6
NetLR2_2: "Rel2 IP.2" LR2.2 PFET2.3 | length 23.9
  Bottom Layer w0.25: LR2.2 188.285,78.11 191.975,81.8
  Bottom Layer w1: PFET2.3 191.975,81.8 193.3,80.475
NetLR3_2: "Rel3 IP.2" LR3.2 PFET3.3 | length 23.1
  Bottom Layer w0.25: LR3.2 187.16,58.51 190.15,61.5
  Bottom Layer w1: PFET3.3 190.15,61.5 193.3,58.35
NetLR4_2: "Rel4 IP.2" LR4.2 PFET4.3 | length 22
  Bottom Layer w0.25: LR4.2 185.935,37.81 188.825,40.7
  Bottom Layer w1: PFET4.3 188.825,40.7 193.3,36.225
NetLR5_2: "Rel5 IP.2" LR5.2 PFET5.3 | length 23
  Bottom Layer w0.25: LR5.2 184.8,18.6 186.4,20.2
  Bottom Layer w1: PFET5.3 186.4,20.2 192.5,14.1 193.3,14.1
NetMEGA_55: MEGA.55 Power.2 | length 77.2
  Top Layer w0.25: MEGA.55 15.3,30.3 26.74,18.86 Power.2
NetMEGA_56: MEGA.56 Power.3 | length 73.2
  Top Layer w0.25: MEGA.56 17.84,31.06 27.5,21.4 Power.3
NetMEGA_62: "VD 1A.2" "VD 1B.1" MEGA.62 | length 424.8
  Top Layer w0.25: MEGA.62 35.62,40.18 44.9,30.9 61.8,30.9 63.5,29.2 63.5,12.5 70.2,5.8 252.1,5.8 265.6,19.3 265.6,32.4 257.6,40.4 257.6,72.4 266.5,81.3 266.5,95.8 255.4,106.9 240.3,106.9 237.2,103.8 237.2,94.6 237.2,93.3 242.4,88.1 250.89,88.1
  Bottom Layer w0.25: 250.69,90.8 250.79,90.7 250.89,88.1
NetMEGA_63: "VD 2A.2" "VD 2B.1" MEGA.63 | length 265.5
  Top Layer w0.25: MEGA.63 38.16,41.54 47.3,32.4 63.1,32.4 65.7,29.8 65.7,13.1 71.987,6.813 222.813,6.813 232.4,16.4 245.9,29.9 251.09,29.9
  Bottom Layer w0.25: 251.09,27.2 251.09,29.9
NetOA1_2: OA1.2 Zener1C.2 Zener1CRes.1 | length 116.9
  Bottom Layer w0.25: Zener1CRes.1 110.02,94 Zener1C.2 108.02,91.8 86.2,91.8 81.7,96.3 81.7,106.4 84.8,109.5 140.19,109.5 OA1.2@143.78,105.91 ; 140.736,108.954 OA1.2@143.78,105.91 ; OA1.2@143.735,105.955 OA1.2@143.78,105.91
NetOA1_6: OA1.6 Zener1B.2 Zener1BRes.1 | length 39.4
  Top Layer w0.25: Zener1B.2 110.12,101.72 110.7,102.3 130.01,102.3 ; 130.01,102.3 133.62,105.91 130.01,102.3
  Bottom Layer w0.25: Zener1BRes.1 109.37,98.6 Zener1B.2
NetOA1_9: OA1.9 Zener1A.2 Zener1ARes.1 | length 55
  Bottom Layer w0.25: Zener1ARes.1 108.52,103.2 ; Zener1A.2 108.52,103.2 ; 108.52,103.2 128.71,103.2 ; 128.71,103.2 OA1.9@133.62,98.29 ; 128.71,103.2 OA1.9@133.575,98.335 ; 128.71,103.2 OA1.9@133.62,98.29 ; 128.71,103.2 OA1.9@133.575,98.335 ; OA1.9@133.575,98.335 OA1.9@133.62,98.29 ; OA1.9@133.575,98.335 OA1.9@133.62,98.29
NetOA1_13: OA1.13 Zener2C.2 Zener2CRes.1 | length 54.5
  Top Layer w0.25: Zener2C.2 116.5,73.1 126.9,83.5 126.9,89.4 129.596,92.096 135.669,92.096 135.673,92.1 137.5,92.1 OA1.13
  Bottom Layer w0.25: Zener2CRes.1 108.32,74.9 Zener2C.2
NetOA2_2: OA2.2 Zener2B.2 Zener2BRes.1 | length 44.5
  Bottom Layer w0.25: Zener2BRes.1 109.12,79.55 ; Zener2B.2 109.12,79.55 ; OA2.2 141.969,85.579 140.449,85.579 137.47,82.6 122.889,82.6 121.189,80.9 110.4,80.9 109.12,79.62 109.12,79.55
NetOA2_6: OA2.6 Zener2A.2 Zener2ARes.1 | length 33.1
  Bottom Layer w0.25: Zener2ARes.1 109.92,84.2 Zener2A.2 111.82,82.3 120.2,82.3 121.9,84 131.7,84 132.72,85.02 OA2.6@132.72,87.21
NetOA2_9: OA2.9 Zener3C.2 Zener3CRes.1 | length 69.9
  Top Layer w0.25: Zener3C.2 112,52.4 113.4,53.8 119.7,53.8 122.3,56.4 122.3,67.2 118.263,71.237 118.263,73.863 127.804,83.404 127.804,86.404 129.737,88.337 131.364,88.337 132.027,87.674 132.027,82.181 133.44,80.768 OA2.9
  Bottom Layer w0.25: Zener3CRes.1 109.02,52.6 Zener3C.2
NetOA2_13: OA2.13 Zener3B.2 Zener3BRes.1 | length 58.1
  Top Layer w0.25: Zener3BRes.1 Zener3B.2@109.72,57.65
  Bottom Layer w0.25: Zener3B.2@109.72,57.65 Zener3B.2 113.17,60.3 120.9,60.3 126.7,66.1 126.7,78.6 129.5,81.4 141.79,81.4 OA2.13
NetOA3_2: OA3.2 Zener3A.2 Zener3ARes.1 | length 51.4
  Bottom Layer w0.25: Zener3ARes.1 109.82,62.7 Zener3A.2 110.12,61.02 107.9,58.8 107.9,56.9 109.4,55.4 140.52,55.4 OA3.2
NetOA3_6: OA3.6 Zener4C.2 Zener4CRes.1 | length 104.9
  Bottom Layer w0.25: Zener4CRes.1 108.72,34.4 Zener4C.2 107.82,30.7 83.5,30.7 80.9,33.3 80.9,43.7 86.1,48.9 130.38,48.9 OA3.6
NetOA3_9: OA3.9 Zener4B.2 Zener4BRes.1 | length 33.4
  Bottom Layer w0.25: Zener4BRes.1 109.97,38.6 Zener4B.2 116.35,38.45 117.5,37.3 126.4,37.3 OA3.9
NetOA3_13: OA3.13 Zener4A.2 Zener4ARes.1 | length 52.5
  Bottom Layer w0.25: Zener4ARes.1 109.02,42.8 Zener4A.2 111.8,43.9 114.9,40.8 123.874,40.8 134.747,51.673 134.747,52.457 135.557,53.267 136.627,53.267 137.573,52.321 137.573,51.673 138.233,51.013 139.114,51.013 140.931,49.196 143.78,46.347 OA3.13
NetOA4_2: OA4.2 Zener5C.2 Zener5CRes.1 | length 127.2
  Bottom Layer w0.25: Zener5CRes.1 108.62,14.2 Zener5C.2 106.12,8.7 84.3,8.7 78.1,14.9 78.1,21.8 84.777,28.477 131.547,28.477 131.624,28.4 133.076,28.4 133.153,28.477 134.087,28.477 134.164,28.4 135.616,28.4 135.693,28.477 136.627,28.477 136.704,28.4 137.21,28.4 137.287,28.477 137.287,35.287 139,37 141.75,37 OA4.2
NetOA4_6: OA4.6 Zener5B.2 Zener5BRes.1 | length 132.8
  Bottom Layer w0.25: Zener5BRes.1 109.62,18.85 Zener5B.2 113.7,14.77 113.7,9.6 110.9,6.8 82.6,6.8 75.9,13.5 75.9,22.9 82.6,29.6 122.8,29.6 130.3,37.1 132.1,37.1 133.62,35.58 OA4.6
NetOA4_9: OA4.9 Zener5A.2 Zener5ARes.1 | length 33.6
  Bottom Layer w0.25: Zener5ARes.1 Zener5A.2@109.62,23.5 ; Zener5A.2 113.8,23.5 115.1,22.2 128.47,22.2 OA4.9 ; Zener5A.2@109.62,23.5 110.12,24 Zener5A.2@109.62,23.5
VCC: 5V.1 "5V Conv OUT.1" "CS1 Cont.1" "CS2 Cont.1" "Rel1 Coil.2" "Rel2 Coil.2" "Rel3 Coil.2" "Rel4 Coil.2" "Rel5 Coil.2" AND1.14 AND2.14 OA1.4 OA2.4 OA3.4 OA4.4 | length 559.2
  Top Layer w0.25: OA2.4 141.41,90.1 145.2,90.1 148.8,93.7 148.8,98.6 146.5,100.9 139.626,100.9 137.107,98.381 137.107,97.733 133.674,94.3 130.1,94.3 129.2,95.2 129.2,98.1 133.9,102.8 137.5,102.8 138.52,103.82 OA1.4 ; OA3.4 138.7,47.4 140.1,46 140.1,37 138.7,35.6 OA4.4 138.7,29.8 139.973,28.527 139.973,16.387 AND2.14 147.98,10.18 150,12.2 184.3,12.2 187.9,15.8 187.9,20.9 195.2,28.2 225.4,28.2 232.8,35.6 232.8,54.4 236.75,58.35 247.2,58.35 251,62.15 251,77 247.525,80.475 ; 247.2,14.1 256.6,14.1 261.8,19.3 261.8,32.8 259.8,34.8 249.1,34.8 247.675,36.225 247.2,36.225 ; 247.2,80.475 247.525,80.475 ; 247.2,102.6 253.2,102.6 261.9,93.9 261.9,83.2 259.175,80.475 247.525,80.475
  Bottom Layer w0.25: OA1.4 140.44,103.9 143.274,103.9 144.727,105.353 144.727,107.827 151.973,107.827 151.973,67.343 AND1.14 150.1,57.91 150.1,52.8 147,49.7 141.14,49.7 OA3.4 ; 247.2,36.225 250.3,36.225 ; 247.2,58.35 244.75,58.35 243.7,57.3 243.7,46.5 250.3,39.9 250.3,36.225 ; 247.2,102.6 250.56,105.96 265.96,105.96 ; 288.64,46.7 288.64,43.66 288.64,37.84 287.025,36.225 250.3,36.225
  Bottom Layer w1: 287.24,48.1 288.64,46.7 291.68,43.66 5V.1
pads on no net: "Rel1 IP.1" "Rel2 IP.1" "Rel3 IP.1" "Rel4 IP.1" "Rel5 IP.1" AND2.8 AND2.9 AND2.10 AND2.11 Bal.Conn.1.4 Bal.Conn.2.4 Bal.Conn.3.4 Bal.Conn.4.4 Bal.Conn.5.4 DB0.1 MEGA.0 MEGA.1 MEGA.2 MEGA.3 MEGA.4 MEGA.5 MEGA.6 MEGA.7 MEGA.8 MEGA.9 MEGA.10 MEGA.11 MEGA.12 MEGA.13 MEGA.14 MEGA.15 MEGA.16 MEGA.17 MEGA.18 MEGA.19 MEGA.20 MEGA.21 MEGA.42 MEGA.43 MEGA.44 MEGA.45 MEGA.46 MEGA.47 MEGA.48 MEGA.49 MEGA.50 MEGA.51 MEGA.52 MEGA.53 MEGA.54 MEGA.64 MEGA.65 MEGA.66 MEGA.67 MEGA.68 MEGA.69 MEGA.70 MEGA.71 MEGA.72 MEGA.73 MEGA.74 MEGA.75 MEGA.76 MEGA.77 MEGA.78 MEGA.79 MEGA.80 MEGA.81 OA4.12 OA4.13 OA4.14 Power.1 Power.6

## Silkscreen, mask and mechanical layers (free items; w line width, h text height)
Top Overlay:
  text "Relay IP" at 193.8,108.8 h1.54
  text "Relay Coil" at 237.7,108.2 h1.54
  text "Zener" at 111.7,107.5 h1.54
  text "CS1" at 261.8,107.5 h1.54
  text "A0" at 267.3,107.5 h1.54
  text "+" at 109.2,107.4 h1.54
  text "-" at 119.7,107.1 h1.54
  text "-" at 281.6,106.7 h1.54 r180
  text "-" at 304.1,106.7 h1.54 r180
  text "Bal Conn" at 80,106 h1.54
  text "Zener Res" at 94.1,105.9 h1.54
  text "+" at 292.4,105.3 h1.54 r90
  text "+" at 262.3,105.1 h1.54
  text "-" at 273.3,105.1 h1.54
  text "NO" at 188.5,104.8 h1.54
  text "G" at 168.1,104.5 h1.54
  text "S" at 181.9,103.9 h1.54
  text "+" at 249.3,103 h1.54
  text "+" at 304.7,102.7 h1.54 r90
  text "+" at 91.1,102.4 h1.54
  text "COM" at 187.2,102 h1.54
  text "-" at 249.3,100 h1.54
  text "+" at 158,96.6 h1.54 r90
  text "-" at 91.1,94.6 h1.54
  text "VARUN" at 5.3,93.6 h5
  text "-" at 174.1,93 h1.54
  text "+" at 176.9,92.8 h1.54
  text "-" at 158.1,91.3 h1.54 r90
  text "-" at 304.3,90.8 h1.54 r180
  text "A2" at 246.2,88.9 h1.54
  text "AUV-IITK" at 7.7,87.2 h3
  text "+" at 304.8,87 h1.54 r90
  text "B - Battery" at 41.9,86.6 h1.54
  text "OA - Op Amp" at 41.9,82.983 h1.54
  text "S" at 181.7,82.9 h1.54
  text "NO" at 188.5,82.7 h1.54
  text "+" at 91.2,82.4 h1.54
  text "G" at 168.3,81.1 h1.54
  text "+" at 248.7,80.8 h1.54
  text "COM" at 187.6,79.7 h1.54
  text "CS - Curr Sens" at 41.9,78.852 h1.54
  text "+" at 157.9,78.5 h1.54 r90
  text "-" at 248.5,76.9 h1.54
  text "LR - LED Res" at 41.9,75.235 h1.54
  text "-" at 304.2,75 h1.54 r180
  text "-" at 90.8,74.8 h1.54
  text "-" at 158.1,73 h1.54 r90
  text "-" at 174.2,72.3 h1.54
  text "+" at 176.8,72.3 h1.54
  text "VD - Vol Div" at 41.9,71.617 h1.54
  text "+" at 304.8,71.2 h1.54 r90
  text "IP-" at 269.6,69.9 h1.54
  text "IP+" at 258.5,69.8 h1.54
  text "+" at 91.4,62.5 h1.54
  text "S" at 182.1,62.5 h1.54
  text "-" at 265.1,62.3 h1.54 r180
  text "G" at 168.3,61.9 h1.54
  text "+" at 268.5,61.1 h1.54 r90
  text "NO" at 188.7,60.6 h1.54
  text "+" at 159.6,59.7 h1.54 r90
  text "-" at 304,59 h1.54 r180
  text "COM" at 187.9,57.6 h1.54
  text "+" at 248.7,57.6 h1.54
  text "-" at 248.8,54.9 h1.54
  text "+" at 304.7,54.9 h1.54 r90
  text "-" at 91.1,54.7 h1.54
  text "-" at 159.7,54.3 h1.54 r90
  text "-" at 174.2,52 h1.54
  text "+" at 176.8,52 h1.54
  text "-" at 282.1,48.9 h1.54 r180
  text "+" at 291.3,47.7 h1.54 r90
  text "-" at 303.8,46.9 h1.54 r180
  text "A1" at 285.1,44.7 h1.54
  text "-" at 280.1,42.8 h1.54
  text "+" at 290.7,42.8 h1.54
  text "+" at 304.3,42.8 h1.54 r90
  text "+" at 91,42.6 h1.54
  text "+" at 159.1,42.2 h1.54 r90
  text "S" at 181.9,41.9 h1.54
  text "G" at 168.1,41.5 h1.54
  text "NO" at 188.9,38.4 h1.54
  text "-" at 159,36.8 h1.54 r90
  text "+" at 249.2,35.6 h1.54
  text "COM" at 187.7,35.4 h1.54
  text "-" at 90.9,34.7 h1.54
  text "-" at 249.2,33.4 h1.54
  text "+" at 176.5,31.3 h1.54
  text "-" at 173.9,31.1 h1.54
  text "LCD" at 31.8,30.3 h1.54
  text "-" at 303.8,29.2 h1.54 r180
  text "A3" at 246.9,27.4 h1.54
  text "+" at 304.3,25.2 h1.54 r90
  text "+" at 159.1,23.7 h1.54 r90
  text "+" at 91.5,22.7 h1.54
  text "S" at 181.8,21.3 h1.54
  text "G" at 168.5,21 h1.54
  text "-" at 159.1,18.1 h1.54 r90
  text "NO" at 189.4,15.9 h1.54
  text "-" at 91.1,14.8 h1.54
  text "+" at 248.4,14.7 h1.54
  text "COM" at 188,13.3 h1.54
  text "-" at 303.6,11.4 h1.54 r180
  text "-" at 248.7,10.8 h1.54
  text "+" at 176.7,10.4 h1.54
  text "-" at 173.8,10.3 h1.54
  text "-" at 262,9 h1.54 r180
  text "+" at 271.8,7.7 h1.54 r90
  text "IP-" at 289.9,7.6 h1.54
  text "IP+" at 278.6,7.3 h1.54
  text "+" at 304.2,7.2 h1.54 r90
Mechanical 1:
  the board outline again, w0.1